# Altium PCB Ant_V1_PCB.PcbDoc
Units mil, origin at the board's own origin, x right, y up, seen from the top; angles counter-clockwise.
Board outline 1889.76 x 3346.46 mil, 2 copper layers (Top Layer, Bottom Layer); 101 components, 67 nets, 376 pads, 165 vias.
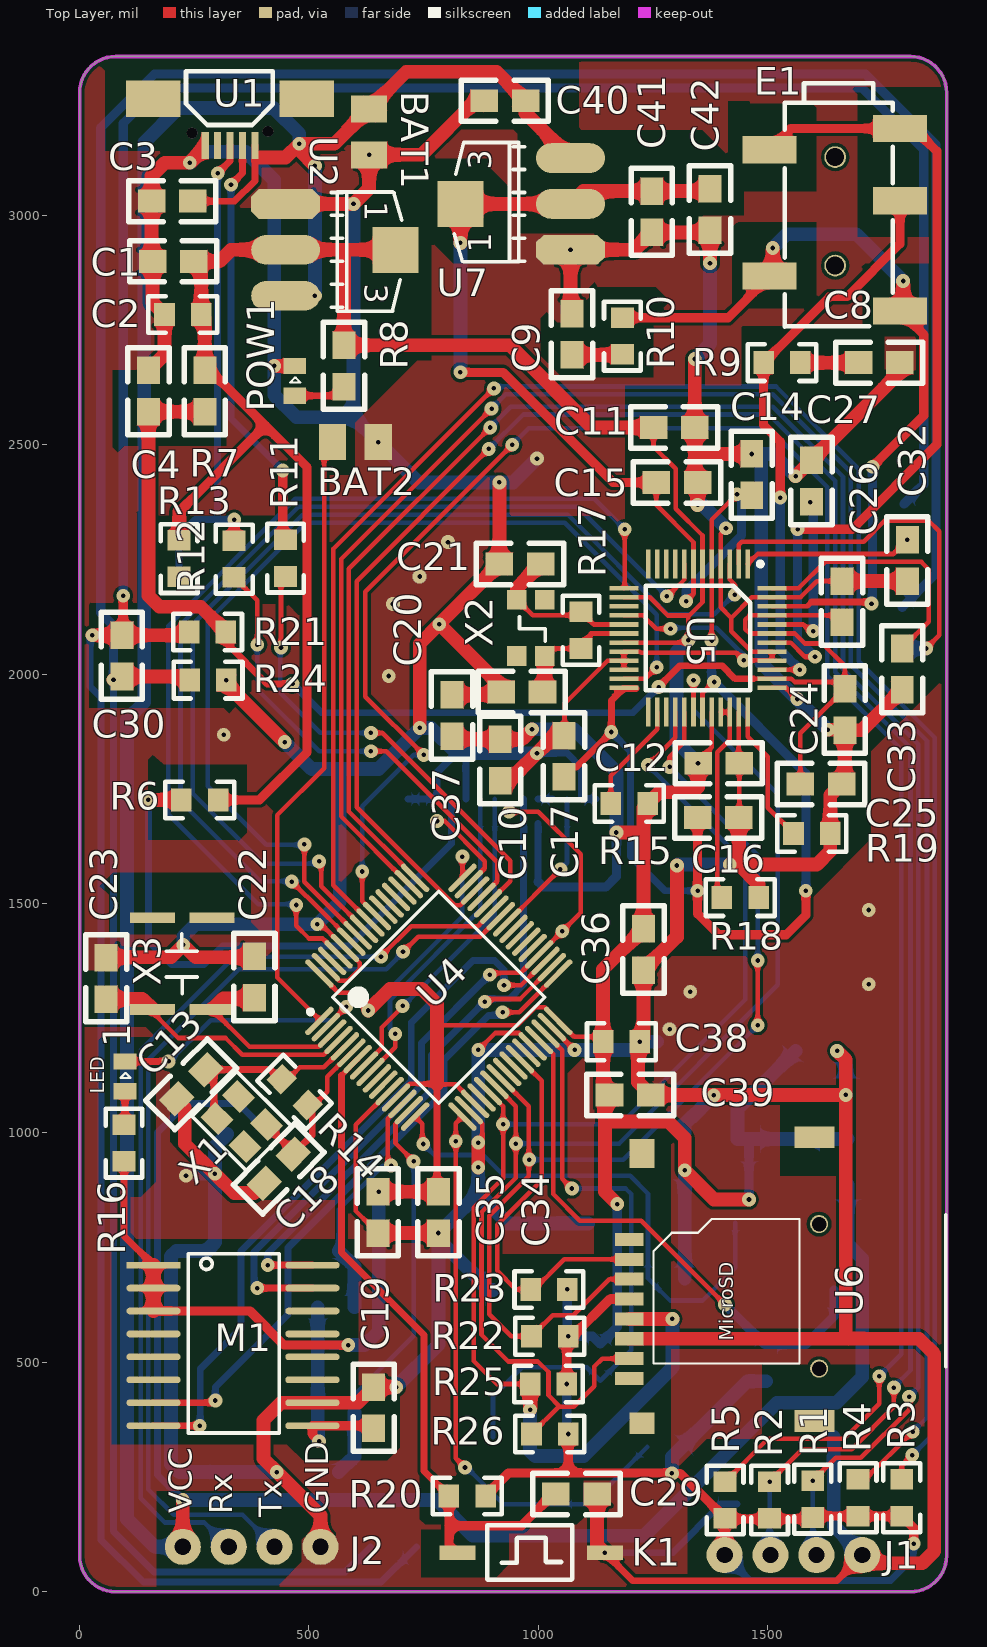
[diagram p0: Top Layer view]
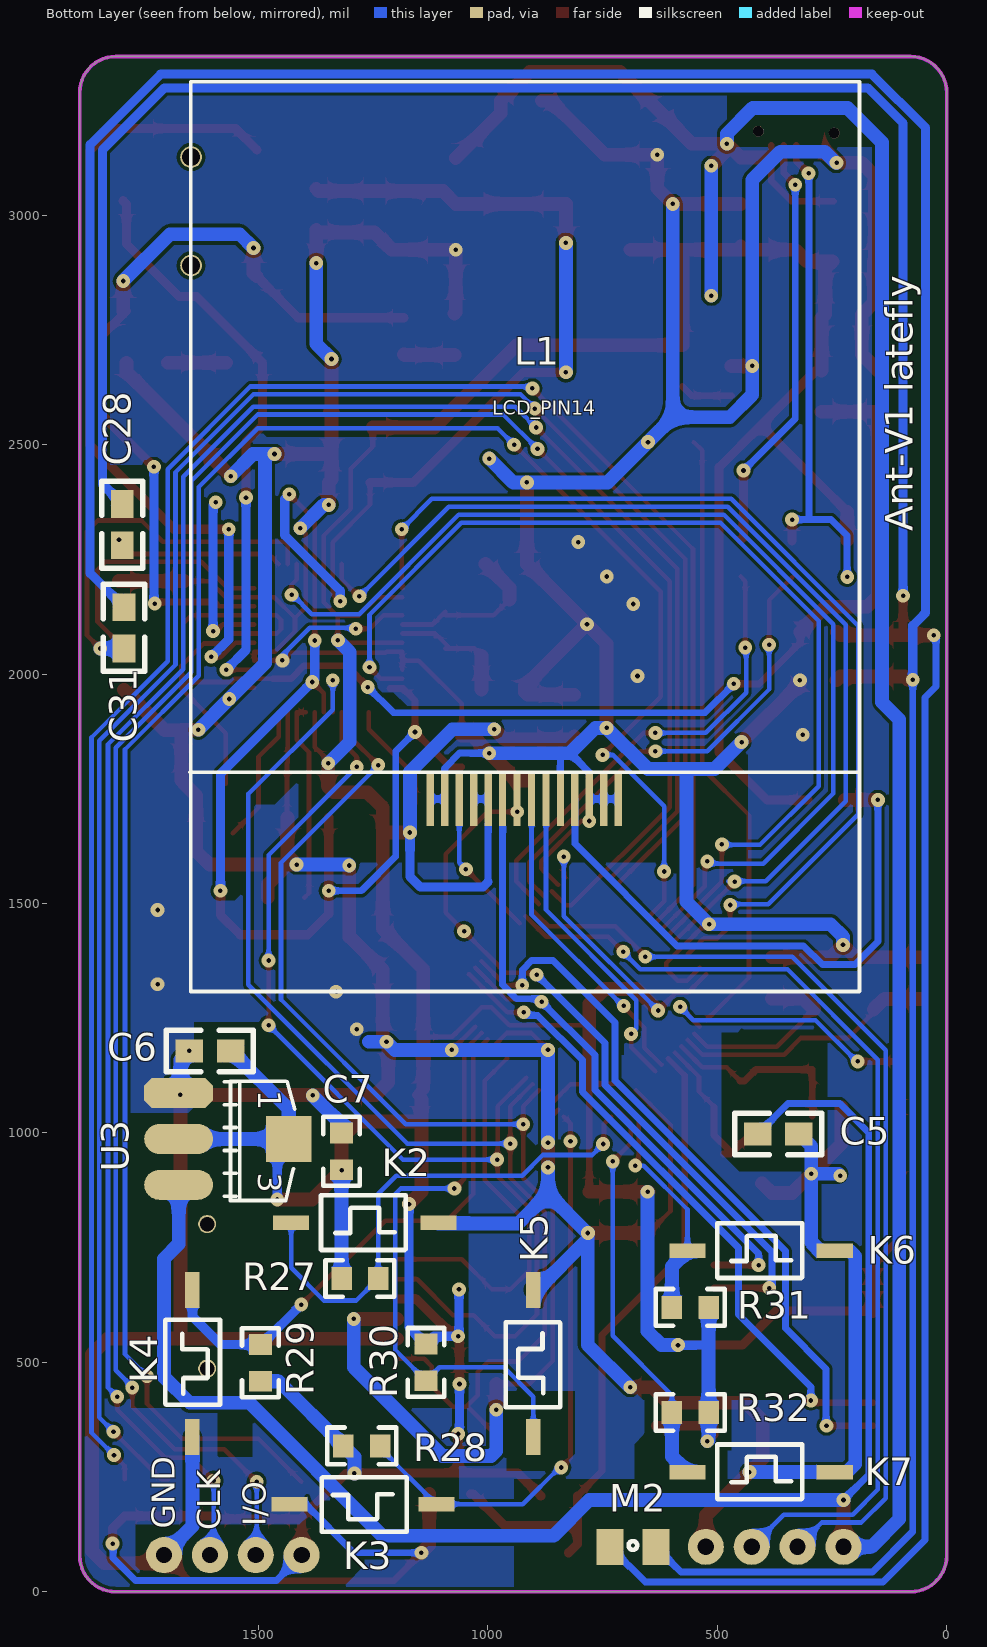
[diagram p1: Bottom Layer view, seen from below]

## Layer stack, top to bottom
Top Solder: solder mask 0.4, Solder Resist, Dk 3.5
Top Layer: signal copper 1.4
Dielectric 1: dielectric 12.6, FR-4, Dk 4.8
Bottom Layer: signal copper 1.4
Bottom Solder: solder mask 0.4, Solder Resist, Dk 3.5

## Board outline
78.74,0 cw(c78.74,78.74) 0,78.74 0,3267.72 cw(c78.74,3267.72) 78.74,3346.46 1811.02,3346.46 cw(c1811.02,3267.72) 1889.76,3267.72 1889.76,78.74 cw(c1811.02,78.74) 1811.02,0

## Design rules (kind name [scope] priority, off if disabled: settings)
Clearance [All] p1: gap=7
DiffPairsRouting [OnLayer('Top Layer') And InDifferentialPairClass('All Differential Pairs')] p1: maxlimit=10 minlimit=10 mostfreqgap=10 toplayer_minwidth=15 toplayer_maxwidth=15 toplayer_prefwidth=15 bottomlayer_minwidth=15 bottomlayer_maxwidth=15 bottomlayer_prefwidth=15 maxuncoupledlength=500
HoleSize [All] p1: absolutevalues=TRUE maxlimit=100 minlimit=8 maxpercent=80.000 minpercent=20.000
MinimumSolderMaskSliver [All] p1: minsoldermaskwidth=0
PolygonConnect [All] p1: connectstyle=Direct reliefconductorwidth=10 reliefentries=4 polygonreliefangle="90 Angle" airgapwidth=10
RoomDefinition Ant_V1_Sheet [InComponentClass('Ant_V1_Sheet')] p1: confinementstyle=ConfineIn formatcopy=TRUE lockcomponents=FALSE outline -6799,-7010 -4799,-7010 -4799,-6010 -6799,-6010
RoutingVias [All] p1: holewidth=28 width=50 viastyle="Through Hole" minholewidth=28 minwidth=50 maxholewidth=28 maxwidth=50
SilkToSilkClearance [All] p1: silktosilkclearance=0
SilkToSolderMaskClearance [IsPad] p1: minsilkscreentomaskgap=0 clearancetoexposedcopper=TRUE
SolderMaskExpansion [All] p1: expansion=4
UndershootRising [All] p1: maximum=1.000
Width GND [InNet('GND')] p1: maxlimit=50 minlimit=10 preferedwidth=30
Width VCC3.3V [All] p2: maxlimit=50 minlimit=10 preferedwidth=30
Width VCC5V [All] p3: maxlimit=50 minlimit=10 preferedwidth=30
Width [All] p4: maxlimit=12 minlimit=8 preferedwidth=10
25 further rules are at their usual default settings.

## Components (designator, comment, footprint, x,y, rotation, side; value= is the part's Value field where it differs from the comment)
1 "LED" LED_LITTLE 99,1091 r90 top
BAT1 "BATT" BATTERY 631,3232 r270 top
BAT2 "BATT" BATTERY 551,2506 r0 top
C1 "104" 0805#1 159,2900 r0 top
C2 "220uF" 0805#2 265,2784 r180 top
C3 "10uF" 0805#1 157,3031 r0 top
C4 "104" 0805#1 150,2662 r270 top
C5 "10uF" 0805#1 322,998 r0 bottom
C6 "104" 0805#1 1651,1179 r180 bottom
C7 "220uF" 0805#2 1319,920 r90 bottom
C8 "103" 0805#1 1698,2679 r0 top
C9 "103" 0805#1 1073,2696 r90 top
C10 "104" 0805#1 917,1858 r270 top
C11 "104" 0805#1 1251,2538 r0 top
C12 "104" 0805#1 1348,1806 r0 top
C13 "20uF" 0805#1 275,1138 r225 top
C14 "104" 0805#1 1465,2390 r90 top
C15 "104" 0805#1 1257,2418 r0 top
C16 "104" 0805#1 1347,1688 r0 top
C17 "104" 0805#1 1056,1776 r90 top
C18 "20uF" 0805#1 466,954 r225 top
C19 "104" 0805#1 641,356 r90 top
C20 "22" 0805#1 1009,1961 r180 top
C21 "22" 0805#1 1005,2240 r180 top
C22 "20uF" 0805#1 381,1385 r270 top
C23 "20uF" 0805#1 58,1382 r270 top
C24 "104" 0805#1 1668,1968 r270 top
C25 "104" 0805#1 1571,1761 r0 top
C26 "104" 0805#1 1662,2113 r90 top
C27 "1uF" 0805#1 1595,2376 r90 top
C28 "1uF" 0805#1 1797,2371 r270 bottom
C29 "104" 0805#1 1128,213 r180 top
C30 "101" 0805#1 92,1995 r90 top
C31 "1uF" 0805#1 1793,2056 r90 bottom
C32 "104" 0805#1 1804.06,2203 r90 top
C33 "104" 0805#1 1793,1966 r90 top
C34 "104" 0805#1 782,782 r90 top
C35 "104" 0805#1 650,782 r90 top
C36 "104" 0805#1 1229,1355 r90 top
C37 "104" 0805#1 812,1955 r270 top
C38 "220uF" 0805#2 1141,1199 r0 top
C39 "22" 0805#1 1245,1083 r180 top
C40 "104" 0805#1 882,3250 r0 top
C41 "104" 0805#1 1247,2963 r90 top
C42 "10uF" 0805#1 1374,2968 r90 top
E1 "EARPHONE" EARPHONE 1647,3127 r0 top
J1 "SWD" SWD 1406,80 r0 top
J2 "Uart" Uart 225,98 r0 top
K1 "Key" KEY 824,85 r0 top
K2 "Key" KEY 1428.87,804 r180 bottom
K3 "Key" KEY 1112,191 r0 bottom
K4 "Key" KEY 1644,658 r270 bottom
K5 "Key" KEY 901,337.13 r90 bottom
K6 "Key" KEY 565,743 r180 bottom
K7 "Key" KEY 565,261 r180 bottom
L1 "LCD_Pin14" LCD_PIN14_Rctify 716,1728 r180 bottom
M1 "W25Q128" W25Q128 161,712 r0 top
M2 "MIC" MIC 634,98 r0 bottom
POW1 "DS0" LED_LITTLE 469,2607 r90 top
R1 "10K" 0805#2 1598,242 r270 top
R2 "10K" 0805#2 1504,240 r270 top
R3 "10K" 0805#2 1792,245 r270 top
R4 "10K" 0805#2 1697,245 r270 top
R5 "10K" 0805#2 1407,240 r270 top
R6 "3.9R" 0805#2 222,1726 r0 top
R7 "10R" 0805#1 273,2662 r270 top
R8 "1K" 0805#1 576,2627 r90 top
R9 "10R" 0805#2 1571,2679 r180 top
R10 "10R" 0805#2 1183,2697 r90 top
R11 "27R" 0805#2 449,2213 r90 top
R12 "27R" 0805#2 337,2211 r90 top
R13 "1K" 0805#2 217,2292 r270 top
R14 "1M" 0805#2 497,1061 r135 top
R15 "100K" 0805#2 1158,1718 r0 top
R16 "10K" 0805#2 97,1018 r270 top
R17 "1M" 0805#2 1093,2136 r270 top
R18 "100K" 0805#2 1400,1513 r0 top
R19 "10K" 0805#2 1636,1653 r180 top
R20 "10K" 0805#2 805,209 r0 top
R21 "1K" 0805#2 319,2092 r180 top
R22 "10K" 0805#2 985,557 r0 top
R23 "10K" 0805#2 983,659 r0 top
R24 "1K" 0805#2 240,1987 r0 top
R25 "10K" 0805#2 1062,453 r180 top
R26 "10K" 0805#2 1065,344 r180 top
R27 "10K" 0805#2 1239,683 r0 bottom
R28 "10K" 0805#2 1235,318 r0 bottom
R29 "10K" 0805#2 1496,539 r270 bottom
R30 "10K" 0805#2 1135,460 r90 bottom
R31 "10K" 0805#2 599,620 r180 bottom
R32 "10K" 0805#2 599,391 r180 bottom
U1 "MicroUSB" USB 328,3152 r0 top
U2 "AMS1117-3.3" AMS1117 449,3025 r270 top
U3 "AMS1117-3.3" AMS1117 1674,1087 r270 bottom
U4 "STM32F103RGT6" STM-LQFP64_M 783,1296 r45 top
U5 "VS1053B/VS1003B" mTQFP48 1405,2074 r270 top
U6 "MicroSD" MICROSD 1198,768 r90 top
U7 "AMS1117-1.8" AMS1117 1070,2925 r90 top
X1 "8MHz" XTAL_8M 299,1032 r135 top
X2 "12.288MHz" XTAL_12.288M 1014,2040 r270 top
X3 "32.768Hz" XTAL32.768K_4Pin' 159,1269 r90 top

## Footprints (in the part's own frame and the unit in brackets; to place one, negate y for a bottom-side part, rotate by r counter-clockwise, add the part's x,y. Pads: shape width x height; smd on the part's side, far side on the other; paste and mask are expansions set on the pad)
0805#1 [mil]
  rect 60x50 smd: 1(0,-0.06) 2(90,-0.06)
  silkscreen extent -50,-45 140,45
0805#2 [mil]
  rect 44.88x50 smd: 1(0,0) 2(80,0)
  silkscreen extent -35,-40 115,40
AMS1117 [mil]
  oct 65x150 smd: 1(0.03,-0.06)
  oval 65x150 smd: 2(100.03,-0.06) 3(200.03,-0.06)
  rect 100x100 smd: 4(100.03,239.94)
  silkscreen extent -26,100 234,253
BATTERY [mm]
  rect 1.5x2 smd: 1(0,0) 2(2.54,0)
EARPHONE [mm]
  rect 3x1.5 smd: 1(-3.632,-6.591) 2(-3.632,0.409) 3(3.581,1.584) 4(3.581,-2.416) 5(3.581,-8.516)
  round 1.2 hole 1 unplated: 6(0,0) 7(0,-6)
  silkscreen extent -2.79,-9.39 3.17,4.1
KEY [mm]
  rect 2x0.8 smd: 1(0,0) 2(8.15,0)
  silkscreen extent 1.65,-1.5 6.35,1.52
LCD_PIN14_Rctify [mm] "this is a updata to LCD_Pin"
  rect 0.4x3 smd: 1(0,0) 2(-0.8,0) 3(-1.6,0) 4(-2.4,0) 5(-3.2,0) 6(-4,0) 7(-4.8,0) 8(-5.6,0) 9(-6.4,0) 10(-7.2,0) 11(-8,0) 12(-8.8,0) 13(-9.6,0) 14(-10.4,0)
  silkscreen extent -23.72,-10.65 13.36,39.7
LED_LITTLE [mm]
  rect 0.9x1.25 smd: 1(0,0) 2(1.65,0)
  silkscreen extent 0.74,-0.3 0.99,0.25
MIC [mm]
  rect 1.5x2 smd: 1(0,0) 2(2.54,0)
  silkscreen extent 1.03,-0.32 1.51,0.16
MICROSD [mm]
  rect 0.725x1.6 smd: 1(0,0) 2(-1.1,0) 3(-2.2,0) 4(-3.3,0) 5(-4.4,0) 6(-5.5,0) 7(-6.6,0) 8(-7.7,0)
  rect 1.6x1.4 smd: 9(4.76,-0.711)
  rect 1.2x2.2 smd: 10(5.649,-10.262) 11(-10.049,-10.262)
  rect 1.2x1.4 smd: 12(-10.176,-0.711)
  round 1 hole 0.8 unplated: 13(0.85,-10.513) 14(-7.15,-10.513)
  silkscreen extent -7.03,-17.53 1.37,-1.35
mTQFP48 [mm]
  rect 1.6x0.254 smd: 1(-4.223,1.3) 2(-4.223,0.8) 3(-4.223,0.3) 4(-4.223,-0.2) 5(-4.223,-0.7) 6(-4.223,-1.2) 7(-4.223,-1.7) 8(-4.223,-2.2) 9(-4.223,-2.7) 10(-4.223,-3.2) 11(-4.223,-3.7) 12(-4.223,-4.2) 25(3.977,-4.2) 26(3.977,-3.7) 27(3.977,-3.2) 28(3.977,-2.7) 29(3.977,-2.2) 30(3.977,-1.7) 31(3.977,-1.2) 32(3.977,-0.7) 33(3.977,-0.2) 34(3.977,0.3) 35(3.977,0.8) 36(3.977,1.3)
  rect 0.254x1.6 smd: 13(-2.873,-5.55) 14(-2.373,-5.55) 15(-1.873,-5.55) 16(-1.373,-5.55) 17(-0.873,-5.55) 18(-0.373,-5.55) 19(0.127,-5.55) 20(0.627,-5.55) 21(1.127,-5.55) 22(1.627,-5.55) 23(2.127,-5.55) 24(2.627,-5.55) 37(2.627,2.65) 38(2.127,2.65) 39(1.627,2.65) 40(1.127,2.65) 41(0.627,2.65) 42(0.127,2.65) 43(-0.373,2.65) 44(-0.873,2.65) 45(-1.373,2.65) 46(-1.873,2.65) 47(-2.373,2.65) 48(-2.873,2.65)
  silkscreen extent -4.35,-4.35 2.78,2.12
STM-LQFP64_M [mm] "Thin QFP, 64-Leads, Body 10x10mm, Pitch 0.5mm, IPC Low Density"
  oval 2.1x0.3 smd: 1(-5.6,3.75) 2(-5.6,3.25) 3(-5.6,2.75) 4(-5.6,2.25) 5(-5.6,1.75) 6(-5.6,1.25) 7(-5.6,0.75) 8(-5.6,0.25) 9(-5.6,-0.25) 10(-5.6,-0.75) 11(-5.6,-1.25) 12(-5.6,-1.75) 13(-5.6,-2.25) 14(-5.6,-2.75) 15(-5.6,-3.25) 16(-5.6,-3.75) 33(5.6,-3.75) 34(5.6,-3.25) 35(5.6,-2.75) 36(5.6,-2.25) 37(5.6,-1.75) 38(5.6,-1.25) 39(5.6,-0.75) 40(5.6,-0.25) 41(5.6,0.25) 42(5.6,0.75) 43(5.6,1.25) 44(5.6,1.75) 45(5.6,2.25) 46(5.6,2.75) 47(5.6,3.25) 48(5.6,3.75)
  oval 0.3x2.1 smd: 17(-3.75,-5.6) 18(-3.25,-5.6) 19(-2.75,-5.6) 20(-2.25,-5.6) 21(-1.75,-5.6) 22(-1.25,-5.6) 23(-0.75,-5.6) 24(-0.25,-5.6) 25(0.25,-5.6) 26(0.75,-5.6) 27(1.25,-5.6) 28(1.75,-5.6) 29(2.25,-5.6) 30(2.75,-5.6) 31(3.25,-5.6) 32(3.75,-5.6) 49(3.75,5.6) 50(3.25,5.6) 51(2.75,5.6) 52(2.25,5.6) 53(1.75,5.6) 54(1.25,5.6) 55(0.75,5.6) 56(0.25,5.6) 57(-0.25,5.6) 58(-0.75,5.6) 59(-1.25,5.6) 60(-1.75,5.6) 61(-2.25,5.6) 62(-2.75,5.6) 63(-3.25,5.6) 64(-3.75,5.6)
  silkscreen extent -5.72,-4.15 4.15,4.57, body extent -5,-5 5,5, height 1.6
SWD [mm]
  round 2 hole 0.9: 1(0,0) 2(2.54,0) 3(5.08,0) 4(7.62,0)
Uart [mm]
  round 2 hole 0.9: 1(0,0) 2(2.54,0) 3(5.08,0) 4(7.62,0)
USB [mm]
  rect 0.4x1.5 smd: 1(-1.38,0) 2(-0.69,0) 3(0,0) 4(0.69,0) 5(1.38,0)
  rect 3x2 smd: 6(4.25,2.6) 7(-4.25,2.6)
  round 0.6 hole 0.6 unplated: 8(2.1,0.8) 9(-2.1,0.7)
  silkscreen extent -2.44,1.14 2.36,4.11
W25Q128 [mm]
  rect 3x0.37 smd: 1(0,0)
  oval 3x0.37 smd: 2(0,-1.27) 3(0,-2.54) 4(0,-3.81) 5(0,-5.08) 6(0,-6.35) 7(0,-7.62) 8(0,-8.89) 9(8.8,-8.89) 10(8.8,-7.62) 11(8.8,-6.35) 12(8.8,-5.08) 13(8.8,-3.81) 14(8.8,-2.54) 15(8.8,-1.27) 16(8.8,0)
  silkscreen extent 1.93,-9.3 6.96,0.64
XTAL32.768K_4Pin' [mm]
  rect 0.6x2.5 smd: 1(0,0) 2(0,-3.3) 3(5.08,-3.3) 4(5.08,0)
  silkscreen extent 0.88,-2.46 4.19,-0.76
XTAL_8M [mm]
  rect 1.4x1.2 smd: 1(0,0) 2(-2.2,-1.7) 3(0,-1.7) 4(-2.2,0)
  silkscreen extent -3.23,-2.62 1.04,0.89
XTAL_12.288M [mm]
  rect 1.1x1.1 smd: 1(0,0) 2(-3.103,-1.552) 3(-3.103,0) 4(0,-1.552)
  silkscreen extent -2.16,-1.4 -0.81,0.03

## Part data
1 POW1: library part LED2, "Typical RED, GREEN, YELLOW, AMBER GaAs LED"
BAT1 BAT2: library part BAT
C1 C4 C6 C8 C9 C10 C11 C12 C14 C15 C16 C17 C20 C21 C24 C25 C26 C27 C28 C29 C30 C31 C32 C33 C39 C40 C41 C42: library part C
C2 C7 C38: library part CAP
C3 C5 C13 C18 C19 C22 C23 C34 C35 C36 C37: library part C_2
R1 R2 R3 R4 R5 R6 R9 R10 R15 R17 R18 R19 R20 R21 R22 R23 R24 R25 R26: library part Res1, "Resistor"
R7 R8 R11 R12 R13 R14 R16 R27 R28 R29 R30 R31 R32: library part R
U2 U3 U7: library part AMS1117
U4: "ARM Cortex-M3 32-bit MCU, 1024 KB Flash, 96 KB Internal RAM, 51 I/Os, 64-pin LQFP, -40 to 85 degC, Tray"
U5: library part VS1053
X1 X2 X3: library part XTAL, "Crystal Oscillator"

## Via types
v1: diameter 30/30 (per signal layer), hole 10, Top Layer to Bottom Layer, 165 vias

## Nets (pads, with @x,y where several pads share a name; then routed paths per layer and width w, separated by ;. In a path a pad name is that pad's centre, name@x,y a point inside that pad or via, vN(x,y) a via of type N, cw(c..) or ccw(c..) an arc to the next point about the centre after c; other vN are vias at no path point)
AVDD: C4.2 C24.1 C25.1 C26.1 R7.2 R21.1 U5.38 U5.43 U5.45 | length 3012.1
  Top Layer w10: 1470.74,1990.26 U5.38 1551.44,1990.26 1558.76,1982.94 1652.99,1982.94 C24.1 ; C25.1 1571,1871.06 C24.1 ; C26.1 1647.01,2128.05 U5.45 1460.05,2128.05 1451,2119 1451,2098.11 1460.42,2088.68 U5.43 1559.13,2088.68 1580.82,2067 1619,2067 1667.94,2018.06 C24.1
  Top Layer w15: R21.1 319,2069 409,1979 v1(464,1979) ; v1(1262,1972) 1308.5,2018.5 1400.5,2018.5 1429,1990 1469,1990
  Top Layer w30: R7.2 C4.2 149.94,2171.06 174,2147 264,2147 R21.1
  Bottom Layer w15: v1(464,1979) 527,1916 1206,1916 v1(1262,1972)
CVDD: C14.1 C15.1 C16.1 C17.1 C41.2 C42.2 U5.5 U5.7 U5.24 U5.31 U7.2 U7.4 | length 4354.8
  Top Layer w10: C15.1 1257,2369 1338.07,2287.93 U5.7 1338.07,2175.07 v1(1322,2159) ; U5.31 1357.76,1958.76 1382,1983 v1(1383,1983) ; v1(1377.44,2073.44) U5.5 1377.44,2336.44 v1(1433,2392)
  Top Layer w15: C17.1@1057.06,1798 1083,1798 v1(1159,1874) 1159,1943.08 1184.92,1969 U5.24@1213,1969
  Top Layer w20: v1(830.06,2657.94) 922.88,2657.94 1162.88,2417.94 C15.1 ; C16.1 1347,1478 1393,1432 1540,1432 1583,1475 v1(1583,1528)
  Top Layer w30: v1(830.06,2940.06) U7.4 U7.2 1098.03,3053 C41.2 1369.06,3053 C42.2
  Bottom Layer w15: v1(1159,1874) 1201,1832 1201,1603 1276,1528 v1(1347,1528)
  Bottom Layer w20: v1(1322,2159) 1322,2182 1443,2303 1443,2382 v1(1433,2392) ; v1(1377.44,2073.44) 1377.44,1988.56 v1(1383,1983) 1583,1783 v1(1583,1528)
  Bottom Layer w30: v1(830.06,2657.94) v1(830.06,2940.06)
D+: R12.2 R13.2 U1.3 | length 1096.4
  Top Layer w15: v1(301,3092) 328,3119 U1.3
  Top Layer w20: R12.2 v1(337,2337)
  Bottom Layer w15: v1(217,2212) 217,2302 252,2337 v1(337,2337) ; 300.5,2337.5 300.5,3091.5 v1(301,3092)
D-: R11.2 U1.4 | length 918.7
  Top Layer w15: v1(330,3067) 355.17,3092.17 U1.4
  Top Layer w20: v1(443,2444) 443,2299 R11.2
  Bottom Layer w15: v1(330,3067) 330,2557 v1(443,2444)
GBUF: E1.2 E1.3 U5.42 | length 1815
  Top Layer w10: U5.42 1550,2069 1581,2038 v1(1603,2038)
  Top Layer w20: E1.2 1550.24,3189.35 E1.3 1819.41,3189.35 1868.56,3140.21 1868.56,2500.56 1684,2316 v1@1574,2316
  Bottom Layer w10: v1@1602.87,2038.13 v1(1603,2038)
  Bottom Layer w20: v1(1565,2316) 1565,2210 1565,2075.75 v1@1602.75,2038
GND: BAT1.2 BAT2.2 C1.1 C2.2 C3.1 C4.1 C5.1 C6.1 C7.2 C8.2 C9.2 C10.2 C11.2 C12.2 C13.2 C14.2 C15.2 C16.2 C17.2 C18.2 C19.2 C20.2 C21.2 C22.1 C23.1 C24.2 C25.2 C26.2 C27.2 C29.1 C32.1 C33.1 C34.1 C35.1 C36.1 C37.1 C38.2 C39.1 C40.1 C41.1 C42.1 J1.4 J2.4 K1.2 K2.2 K3.2 K4.2 K5.2 K6.2 K7.2 L1.1 L1.2 L1.3 L1.5 L1.13 L1.14 M1.10 POW1.2 R18.2 R19.1 R24.2 U1.1 U2.1 U3.1 U4.12 U4.18 U4.28 U4.31 U4.47 U4.60 U4.63 U5.4 U5.16 U5.20 U5.21 U5.22 U5.35 U5.37 U5.40 U5.41 U5.47 U6.6 U7.1 | length 21243.9
  Top Layer w10: v1(518,1455) 526.56,1455 611,1370.56 611,1357 586,1332 566.05,1332 U4.63@538.02,1360.03 ; C35.1 602,830.06 602,1017.56 U4.12@677.21,1092.78 ; v1(779,1680) 795.96,1680 883.52,1592.43 883.52,1577.48 U4.47 U4.47@847.03,1540.98 ; U4.18@847.03,1051.02 878,1020.05 v1@878,988 ; v1(869,1181) 905.86,1217.86 958.57,1217.86 U4.28 ; U4.31@1027.98,1231.97 v1(1078.95,1181) ; C17.2@1057.06,1866 1057.06,1936.06 1150.63,2029.63 U5.21 ; U5.22 U5.21 ; U5.16 1227.95,2128.05 1257,2099 v1(1288,2099) ; v1(1409,2318) 1397.13,2306.13 U5.4 1397.13,2145.69 1420.41,2122.41 1420.41,2093.59 1464.69,2049.31 U5.41 U5.40 1508.96,2030 v1(1448,2030) 1431.56,2046.44 1223.87,2046.44 1221,2049.31 U5.20 U5.21 ; 1420.5,2122.5 1465.42,2167.42 U5.47 1571.42,2167.42 1607,2203 C26.2 ; U5.35 1436.5,1807.44 C12.2 C16.2@1438,1688.94 ; U5.37 1539.43,1970.57 v1(1564,1946)
  Top Layer w15: v1(1144.87,85) 1205.87,24 1650,24 J1.4
  Top Layer w30: C23.1@57.94,1383 199,1383 v1(226,1410) 253,1383 C22.1@380.94,1383 ; C4.1 185,2697.06 C2.2 159,2810 C1.1 157,2901.94 C3.1 157,3086 186,3115 v1(240,3115) U1.1@266,3141 ; 229.32,1055.41 229.32,976.68 v1(295,911) 337,869 380.91,869 C18.2 ; v1(320,1987) 320,1979 v1(447,1852) ; v1(424.04,2671.96) POW1.2 ; U2.1 v1(596.97,3024.97) 631,3059 v1(631,3132) 745,3132 862.94,3249.94 C40.1 ; J2.4 525,166 v1(430,261) 401,290 401,374 439,412 M1.10 607.06,412 C19.2 v1(690,446) ; C35.1 C34.1@776.06,782 ; v1(741.33,1883) 741.33,2066.39 v1(784,2109.06) ; C37.1 912.94,1955 C20.2 919,1974.06 v1(784,2109.06) ; v1(869,925) v1(869,979) ; v1(915,2418) C21.2 v1(784,2109.06) ; C10.2 937.06,1768 v1(997,1827.94) 1035.06,1866 C17.2 C17.2@1057.06,1866 ; C9.2 1070.06,2789 v1(1070.06,2925.03) 1209.1,2925.03 C41.1 1369.06,2963 C42.1 v1(1374.06,2896.06) ; C29.1 1128,101.87 v1(1144.87,85) ; U6.6 1676.54,551.46 ; v1(1221,1199) 1217,1195 1217,1111.06 C39.1 v1(1670.16,1083.06) ; C38.2@1229.06,1207.06 C36.1 1301,1426.94 ; 1302,1426.94 v1(1302,1583) ; v1(1341,2687) C11.2 1341,2480.94 ; v1(1347,2369) C15.2 1341,2423.94 1341,2480.94 ; C16.2 1437,1605 v1(1417,1585) 1437,1585 ; v1(1465.06,2480) 1341.94,2480 1341,2480.94 ; R18.2 1480,1542 1437,1585 ; v1(1560.53,2431.47) C27.2 1788,2658.94 C8.2 ; v1(1631,1879) 1666.94,1879 C24.2 ; v1(1651,1178.94) 1670.16,1159.78 v1(1670.16,1083.06) ; C26.2 C32.1 ; J1.4 1724,62 1836,62 1863,89 1863,518 1829.54,551.46 1676.54,551.46 ; C33.1 1705.06,1878 C24.2 ; 1437,1585 1607,1585 1636,1614 R19.1 1636,1735.94 C25.2 1667.94,1767.87 C24.2 ; v1(1670.16,1083.06) 1670.16,557.84 1676.54,551.46
  Bottom Layer w10: v1@1288,2101.07 1388,2101.07 1448,2041.07 v1(1448,2030)
  Bottom Layer w15: L1.1 L1.2 L1.3 778.99,1785.86 821.06,1827.94 ; L1.5 841.98,1827.92 ; v1(997,1827.94) 1062.06,1827.94 1093.95,1796.05 L1.13 L1.14 ; v1(1144.87,85) 1292,85 1398,191 K3.2
  Bottom Layer w30: v1(226,1410) 226,1428 253,1455 v1(518,1455) 567,1504 567,1793 ; v1@236,911 v1(295,911) ; v1@241,3114 266,3139 362,3139 424.04,3076.96 v1(424.04,2671.96) 424.04,2608.96 472.97,2560.03 596.97,2560.03 ; C5.1 295,971.06 v1(295,911) ; v1(430,261) K7.2 217,261 199.5,278.5 199.5,731.5 211,743 K6.2 276,743 295,762 v1(295,911) ; v1(447,1852) 505.86,1793.14 651.47,1793.14 v1(741.33,1883) 766,1883 821.06,1827.94 842,1827.94 v1(997,1827.94) ; v1(596.97,3024.97) 596.97,2560.03 ; v1(690,446) 782.53,538.53 v1@782.53,768.47 ; v1(782.06,782) v1@782.53,781.53 ; v1(869,925) 869,868 ; v1(869,979) v1(869,1181) ; v1@878,1181 v1(1078.95,1181) 1203,1181 v1(1221,1199) 1259,1199 ; K5.2 893,658 v1@782.53,768.47 ; v1(997,2470) 945,2418 v1(915,2418) 739,2418 v1(651,2506) 596.97,2560.03 ; K2.2@1108,803 934,803 869,868 ; v1(1302,1583) 1304,1585 v1(1417,1585) ; C7.2 1319,1019 v1(1382,1082) ; v1(1341,2687) 1374.06,2720.06 v1(1374.06,2896.06) ; v1(1347,2369) 1358,2369 v1(1409,2318) ; v1(1465.06,2480) 1512,2480 v1(1560.53,2431.47) ; 1486,2480 1486,2024 v1(1564,1946) v1(1631,1879) ; K4.2 1644,143 J1.4@1706,81 ; v1(1651,1178.94) 1670.16,1159.78 v1(1670.16,1083.06) ; v1@782.53,768.47 v1@782.53,781.53 ; v1@782.53,781.53 869,868
  other v1: 232,907 1286,1226 1331,1308 1720,1324 1720,1486 314,1868 674,1996 683,2153 741,2213 803,2288
KEYBACK: K7.1 R32.1 U4.15 | length 884.5
  Top Layer w10: U4.15 688.54,1020.59 688.54,977.46 v1(728,938)
  Bottom Layer w10: R32.1 599,429 728,558 v1(728,938)
  Bottom Layer w30: K7.1 599,295 R32.1
KEYDOWN: K3.1 R28.1 U4.17 | length 1261.2
  Top Layer w10: v1(820,982) 820,1021.2 U4.17 ; v1@820.06,982 820.06,290.94 v1(840,271)
  Bottom Layer w10: v1(840,271) 844,271 924,191 K3.1 1113,191 R28.1@1237.5,315.5
KEYLEFT: K4.1 R29.1 U4.29 | length 1181.5
  Top Layer w10: U4.29@1000.14,1204.13 1032,1172.28 1032,867 1090,809 1224,809 v1(1407,626)
  Bottom Layer w20: v1(1407,626) 1494,539 R29.1 1583,539 1644,600 K4.1
KEYOK: K6.1 R31.1 U4.14 | length 533.9
  Top Layer w10: v1(679,929) 671.54,936.46 671.54,1031.42 U4.14 U4.14@705.05,1064.94
  Bottom Layer w10: K6.1 565,833.31 660.69,929 v1(679,929)
  Bottom Layer w30: K6.1 599,709 R31.1
KEYRIGHT: K5.1 R30.1 U4.30 | length 1292.6
  Top Layer w10: U4.30@1014.06,1218.05 1051.95,1180.16 1051.95,900.05 v1(1073,879)
  Bottom Layer w10: K5.1 901,425 965,489 1106,489 R30.1 1202,527 1202,867 1190,879 v1(1073,879)
KEYUP: K2.1 R27.1 U4.16 | length 1123.9
  Top Layer w10: U4.16 747,1020.2 747,978 v1(749,976)
  Bottom Layer w10: v1(749,976) 773,952 880.18,952 925.18,907 1200,907 1239,868 R27.1 1287,635 1358,635 1428.87,705.87 K2.1
LCD_CS: L1.12 U4.41 | length 325.2
  Top Layer w10: U4.41@930.55,1457.47 v1(1048,1574.92)
  Bottom Layer w10: v1(1048,1574.92) 1062.46,1589.38 L1.12
LCD_DC: L1.7 U4.8 | length 697
  Top Layer w10: U4.8@621.53,1148.45 659,1185.92 659,1230 v1@706,1277
  Bottom Layer w10: v1@706,1277 905,1476 L1.7
  other v1: 704,1277
LCD_RST: L1.6 U4.9 | length 703.7
  Top Layer w10: U4.9@635.45,1134.53 688,1187.08 v1(688,1216)
  Bottom Layer w10: v1(688,1216) 676.5,1227.5 676.5,1289.5 873.48,1486.48 L1.6
  Bottom Layer w15: v1@688.5,1216.5 v1@690,1215
MP3_LEFT: E1.1 E1.5 R10.2 U5.46 | length 1762.5
  Top Layer w10: U5.46 1585.74,2147.74 1595.5,2157.5 ; v1@1725,2155 v1(1726,2154)
  Top Layer w15: 1595.5,2157.5 1722.5,2157.5 v1@1725,2155 ; E1.5@1795,2784.72 E1.5@1795,2791.72
  Top Layer w20: R10.2 1413.48,2777 E1.1 ; v1(1728,2452) 1840,2564 1840,2739.72 1795,2784.72 E1.5
  Top Layer w30: E1.1 1511,2874.52 v1(1511,2929) ; E1.5@1795,2791.72 v1(1795,2857)
  Bottom Layer w20: v1(1726,2154) 1728,2156 v1(1728,2452)
  Bottom Layer w30: v1(1511,2929) 1541,2959 1693,2959 v1(1795,2857)
MP3_RIGHT: E1.4 R9.2 U5.39 | length 1263.4
  Top Layer w10: U5.39 v1(1569.94,2009.94)
  Top Layer w20: v1(1527.18,2385) 1527.18,2506.82 1491,2543 R9.2 1635,2823 1673,2823 1788,2938 1788,3024.87 E1.4@1795,3031.87
  Bottom Layer w20: v1(1527.18,2385) 1527.18,2052.7 v1(1569.94,2009.94)
Net1_1: 1.1 R16.1 | length 73.8
  Top Layer w15: R16.1 99,1020 1.1
Net1_2: 1.2 U4.2 | length 591.6
  Top Layer w10: U4.2@538.02,1231.97 v1(581.05,1275)
  Top Layer w15: 1.2 v1(194,1156)
  Bottom Layer w10: v1@195,1155 286,1246 552.05,1246 v1(581.05,1275)
NetBAT2_1: BAT2.1 U4.1 | length 1348.4
  Top Layer w10: U4.1@524.1,1245.89 431,1338.99 431,1693 533,1795 533,2488 BAT2.1
NetC8_1: C8.1 R9.1 | length 127
  Top Layer w30: R9.1 1571.06,2678.94 C8.1
NetC9_1: C9.1 R10.1 | length 110.4
  Top Layer w30: C9.1 1182,2696 R10.1
NetC13_1: C13.1 R14.2 U4.5 X1.1 | length 427.7
  Top Layer w10: R14.2@450.43,1113.57 479.86,1143 532.56,1143 U4.5
  Top Layer w15: X1.1@292.95,1037.05 292.95,1138 416,1138 440.43,1113.57 R14.2@450.43,1113.57
NetC18_1: C18.1 R14.1 U4.6 X1.2 | length 353.3
  Top Layer w10: C18.1@476.5,964.59 C18.1@487.05,954.05 ; R14.1@507,1057 540,1090 540,1122.6 U4.6
  Top Layer w15: X1.2@425.57,999.08 470.61,954.05 C18.1@487.05,954.05 ; C18.1@476.5,964.59 507,995.09 R14.1@507,1057
NetC20_1: C20.1 R17.2 U5.18 X2.1 | length 271.9
  Top Layer w10: X2.1 1030,2056 R17.2 ; R17.2@1086,2060 1114.68,2088.68 U5.18
  Top Layer w30: C20.1@1014,1966.06 X2.1
NetC21_1: C21.1 R17.1 U5.17 X2.2 | length 365.9
  Top Layer w10: X2.2 953.72,2162.17 987.38,2128.52 1093,2128.52 R17.1 1120.63,2108.37 U5.17
  Top Layer w30: X2.2 952.88,2187.95 ; 953,2187.95 953,2188.06 C21.1
NetC22_2: C22.2 U4.3 X3.2 | length 409.3
  Top Layer w10: X3.2 370.3,1187.62 521.5,1187.62 U4.3
  Top Layer w30: X3.2 312.92,1293 C22.2@380.94,1293
NetC23_2: C23.2 U4.4 X3.1 | length 573.6
  Top Layer w10: X3.1 159,1263 215,1207 318,1207 354.38,1170.62 532.34,1170.62 U4.4
  Top Layer w30: C23.2 136,1292 X3.1
NetC27_1: C27.1 U5.44 | length 372.1
  Top Layer w10: U5.44 1577.63,2108.37 v1@1592,2094
  Bottom Layer w20: v1(1593,2375) 1599,2369 v1(1599,2094)
NetC28_1: C28.1 C30.2 M2.2 R21.2 | length 6694.6
  Top Layer w20: C30.2 95,2087.94 v1(95,2171)
  Top Layer w30: v1(28,2085) C30.2 232,2085 R21.2
  Bottom Layer w15: v1(28,2085) 23,2080 23,1973 47,1949 47,113 139,21 657,21 M2.2
  Bottom Layer w20: v1(95,2171) 95,3201 172,3278 1704.82,3278 1840,3142.82 1840,2413.94 C28.1
NetC28_2: C28.2 C32.2 U5.1 | length 369.8
  Top Layer w10: U5.1 1477.84,2261.92 1617.84,2261.92 1617.92,2262 1773.13,2262 v1(1804.13,2293)
NetC30_1: C30.1 C31.2 M2.1 R24.1 | length 6825.1
  Top Layer w30: v1(74,1988) C30.1@85.06,1988 ; C30.1 232,1995 R24.1
  Bottom Layer w15: v1(74,1988) 74,131 162,43 579,43 M2.1
  Bottom Layer w20: v1(74,1988) 74,2105.82 46,2133.82 46,3191 163,3308 1713,3308 1867,3154 1867,2220.06 C31.2
NetC31_1: C31.1 U5.2 | length 830.5
  Top Layer w10: U5.2 1436.5,2282.5 1443,2289 1709,2289 1755,2335 1850.36,2335 1873.76,2311.59 1873.76,2084.76 v1(1845,2056)
  Bottom Layer w30: C31.1 v1(1845,2056)
NetC33_2: C33.2 U5.48 | length 569.3
  Top Layer w10: U5.48 1567.07,2187.11 1624.96,2245 1835,2245 1835,2244.1 1851,2228.1 1851,2113.94 C33.2
NetL1_4: L1.4 R6.1 | length 1268.9
  Top Layer w30: v1(150,1726) R6.1
  Bottom Layer w15: v1(150,1726) 150,1417 200,1367 271,1367 312,1408 588,1408 810.49,1630.49 L1.4
NetPOW1_1: POW1.1 R8.1 | length 115.3
  Top Layer w15: POW1.1 556.06,2607 R8.1
NetR11_1: R11.1 U4.44 | length 1027.1
  Top Layer w10: v1(439,2058) 439,2203 R11.1 ; v1@634,1872 v1(635,1872) 660,1872 938.28,1593.72 938.28,1548.72 U4.44 U4.44@888.79,1499.22
  Bottom Layer w10: v1(439,2058) 437,2056 437,1959.82 524.82,1872 v1(635,1872)
NetR12_1: R12.1 U4.45 | length 1035.3
  Top Layer w10: R12.1 387.23,2160.77 v1(387.23,2064) ; v1(635,1832) 668,1832 910,1590 910,1548.27 U4.45 U4.45@874.87,1513.14
  Bottom Layer w10: v1(387.23,2064) 387.23,1966.77 522,1832 v1(635,1832)
NetR15_1: R15.1 U5.26 | length 241.4
  Top Layer w10: R15.1 1158,1779 1259.33,1880.33 U5.26
NetR18_1: R18.1 U5.33 U5.34 | length 439.4
  Top Layer w10: U5.33 U5.34 1416.81,1856.72 1390,1829.91 1390,1523 R18.1
NetR19_2: R19.2 U5.36 | length 305.8
  Top Layer w10: U5.36 1456.18,1863.82 1500,1820 1500,1709 R19.2
NRST: C29.2 K1.1 R20.1 U4.7 | length 1458.9
  Top Layer w10: U4.7@606.1,1161.1 U4.7@607.49,1162.49
  Top Layer w12: 571,1125.76 U4.7
  Top Layer w15: 571,1125.76 571,740 751,560 751,263 R20.1
  Top Layer w20: R20.1 805,144 ; K1.1 805,104 805,144 ; C29.2 1032.06,213.06 963,144 805,144
PA15: R4.1 U4.50 | length 4436.9
  Top Layer w10: U4.50@718.97,1540.98 570,1689.95 570,2251.18 898,2579.18 v1(898,2579) ; R4.1 1712,245 v1(1816,349)
  Bottom Layer w10: v1(898,2579) 929,2610 1510.96,2610 1681,2439.96 1681,2020.95 1847,1854.95 1847,380 v1(1816,349)
PB3: R5.1 U4.55 | length 4545.8
  Top Layer w10: v1(616,1570) 616,1504.76 U4.55@649.37,1471.38 ; v1@750,1828.09 v1(750,1824.1) 623,1951.1 623,2180 v1(943,2500) ; R5.1 1501,334 1667,334 1743,410 v1(1743,470)
  Bottom Layer w10: v1(616,1570) 616,1711.9 728.2,1824.1 v1(750,1824.1) ; v1(943,2500) 979,2536 1502,2536 1630,2408 1630,1997 1791,1836 1791,518 v1(1743,470)
PB4: R3.1 U4.56 | length 4516.5
  Top Layer w10: U4.56@635.45,1457.47 553,1539.92 553,2273 v1(903,2623) ; R3.1 1792,275 v1(1815,298)
  Bottom Layer w10: v1(903,2623) 907,2627 1518,2627 1698,2447 1698,2027.99 1864,1861.99 1864,347 v1(1815,298)
PS2_1: U4.10
PS2_2: U4.11
PS2_3: U4.24
PS2_4: U4.25
RX: J2.2 U4.43 | length 2110.7
  Top Layer w10: v1(657,1384) 657,1385.18 722.82,1451 868.4,1451 U4.43
  Bottom Layer w10: J2.2 272,151 186,151 133,204 133,1180 337,1384 v1(657,1384)
SD_CS: R23.1 U4.26 U6.2 | length 854.9
  Top Layer w10: U4.26@958.38,1162.37 1007,1113.76 1007,897 910,800 910,700 951,659 R23.1 991,659 1056.69,724.69 U6.2
SPI1_CLK: R25.2 U4.21 U5.28 U6.5 | length 2894.2
  Top Layer w10: U4.21@888.79,1092.78 923,1058.56 v1(923,1019) 923,901 859,837 859,503 909,453 R25.2 ; v1(1239,1802) 1298.7,1861.7 U5.28
  Top Layer w30: v1(982,397) R25.2 ; U6.5 v1(1292.23,594.77)
  Bottom Layer w10: v1(923,1019) 1179,1019 1451,1291 1451,1589.18 v1@1238.59,1801.59
  Bottom Layer w30: v1(982,397) 982,307 993,296 1099,296 1292.23,489.23 v1(1292.23,594.77)
SPI1_MI: R26.2 U4.22 U5.30 U6.7 | length 2691.5
  Top Layer w10: U4.22@902.71,1106.7 951,1058.4 v1(951,977) 951,901.96 876,826.96 876,560 934,502 999,502 1022,479 1022,428.59 1045.79,404.79 ; R26.2 1044,403 1077,403 1122,448 1122,491 1139.16,508.16 U6.7 ; U5.30 v1(1338.07,1986.93)
  Bottom Layer w10: v1(951,977) 1176,977 1522,1323 1522,1739 1338.07,1922.93 v1(1338.07,1986.93)
SPI1_MO: R22.1 U4.23 U5.29 U6.3 | length 2354.7
  Top Layer w10: U4.23@916.63,1120.62 979,1058.24 979,905.92 893,819.92 893,605 941,557 R22.1 1031,603 1076,603 1154.39,681.39 U6.3 ; v1@1286,1787 1286,1820 1318.39,1852.39 U5.29 ; v1@1471,1228 v1(1478,1235) v1(1478,1376)
  Bottom Layer w10: v1(980,942) 1185,942 v1@1471,1228 ; v1@1286,1787 1297,1787 1478,1606 v1(1478,1376)
  other v1: 1286,1798
SPI2_CLK: L1.9 M1.16 U4.34 | length 1550.4
  Top Layer w10: v1(883,1286) 889,1292 959.95,1292 U4.34@1027.98,1360.03
  Top Layer w15: v1(410,712) M1.16
  Bottom Layer w15: v1(410,712) 410,737 767,1094 767,1170 v1(883,1286) 889.5,1292.5 937.22,1292.5 967.97,1323.25 L1.9 L1.9@967.97,1725.75
SPI2_CS: M1.7 U4.33 | length 1410.8
  Top Layer w10: v1(922,1263) 957.96,1263 1041.07,1346.11 U4.33@1041.9,1346.11
  Top Layer w15: M1.7 291,412 v1(296,417)
  Bottom Layer w15: v1(296,417) 296,446 454,604 454,749.89 794,1089.89 794,1159 891.5,1256.5 915.5,1256.5 v1(922,1263)
SPI2_MI: M1.8 U4.35 | length 1581.5
  Top Layer w10: v1(925,1322) 962.11,1322 U4.35@1014.06,1373.95
  Top Layer w15: M1.8 v1(262,362)
  Bottom Layer w15: v1(262,362) 263,363 263,486 351.5,574.5 351.5,742.5 723,1114 723,1241 857.86,1375.86 904.86,1375.86 925,1355.72 v1(925,1322)
SPI2_MO: L1.8 M1.15 U4.36 | length 1593
  Top Layer w10: v1(894,1345) 898,1349 961.28,1349 v1(1052,1439.72) 1092,1479.72 1092,1608 1000,1700 v1@938,1700
  Top Layer w15: v1(387,662) M1.15
  Bottom Layer w15: v1(387,662) 380.5,668.5 380.5,740.39 745,1104.89 745,1196 v1(894,1345)
  other v1: 936,1700
SWDCLK: J1.3 R1.1 U4.49 | length 4570.9
  Top Layer w10: U4.49@732.89,1554.9 587,1700.79 587,2230 894.82,2537.82 v1(895,2537.82) ; v1(1598,242) 1648,292 1703,292 1808,397 v1(1808,425)
  Bottom Layer w10: v1(895,2537.82) 940.18,2583 1511.09,2583 1664,2430.09 1664,2011.08 1828,1847.08 1828,445 v1(1808,425) ; v1(1598,242) 1598,88 J1.3
SWDIO: J1.2 R2.1 U4.46 | length 4709.1
  Top Layer w10: U4.46@860.95,1527.06 829.89,1496 818,1496 604,1710 604,2203 v1(892,2491) ; v1(1504,240) 1575,311 1683,311 1775,403 v1(1775,445)
  Bottom Layer w10: v1(892,2491) 967,2566 1502.05,2566 1647,2421.05 1647,2004.04 1811,1840.04 1811,483 1775,447 v1(1775,445) ; v1(1504,240) 1504,78 J1.2
TX: J2.3 U4.42 | length 2163.7
  Top Layer w10: v1(705,1395) 738,1428 873.24,1428 U4.42
  Bottom Layer w10: J2.3 355,168 205,168 150,223 150,1160 347,1357 668.18,1357 706.18,1395 v1(705,1395)
VCC3.3V: C1.2 C2.1 C6.2 C7.1 C10.1 C11.1 C12.1 C19.1 C34.2 C35.2 C36.2 C37.2 C38.1 C39.2 J1.1 L1.10 L1.11 M1.1 M1.2 M1.3 M1.9 R1.2 R2.2 R3.2 R4.2 R5.2 R6.2 R7.1 R8.2 R13.1 R15.2 R16.2 R20.2 R22.2 R23.2 R25.1 R26.1 R27.2 R28.2 R29.2 R30.2 R31.2 R32.2 U2.2 U2.4 U3.2 U3.4 U4.13 U4.19 U4.32 U4.48 U4.64 U5.6 U5.14 U5.19 U5.32 U6.4 | length 14443.8
  Top Layer w10: U4.64@524.1,1346.11 564.21,1306 590,1306 v1(629,1267) ; U4.13@691.13,1078.86 719.27,1107 779,1107 ; 779,1106 819.89,1106 U4.19@860.95,1064.94 ; 779,1232 781.86,1234.86 953.86,1234.86 993,1274 1013.79,1274 1078,1209.79 1130.21,1209.79 C38.1 ; U4.48@833.11,1554.9 U4.48 v1(834.5,1602.5) ; U5.19 1322,2069 v1(1327,2074) 1327,2128 ; U5.14 1242.58,2167.42 1282,2128 1329.18,2128 1357.76,2156.57 U5.6 1357.76,2302.24 1299,2361 1299,2447.91 1251,2495.91 C11.1 ; v1(1348,1805.94) 1348,1811.95 1377.44,1841.39 U5.32
  Top Layer w15: R16.2 97,776 M1.1 ; C34.2@779,872 779,1106 ; C12.1@1344,1817.94 1340,1813.94 v1(1348,1805.94)
  Top Layer w20: M1.3 371.34,612 445.63,537.72 v1(585.72,537.72) ; 217,2354 405,2542 ; R7.1 285,2662 405,2542 ; R6.2 392,1726 496,1830 496,2451 405,2542 ; v1(522,328) 507.46,342.54 M1.9 C19.1@635.06,362 ; R20.2 935,259 1065,259 ; v1(1062,453) 1062,554 v1(1065,557) 1075,557 1156.08,638.08 U6.4 ; v1(1065,344) 1065,259 ; C39.2@1141,1097.06 C39.2 ; v1(1818,105) 1818,139 R3.2 R4.2 1601,165 R1.2 1595,159 1406,159 J1.1 1406,161 1309,258 v1(1291,258) 1290,259 1065,259
  Top Layer w30: M1.3 M1.2 M1.1 ; R13.1 217,2354 ; R7.1 272.94,2776.06 C2.1 265,2883.94 C1.2 304.94,2899.94 329.97,2924.97 441.94,2924.97 U2.2@448.94,2931.97 ; U2.2 576,2924.97 ; 576,2924.9 576,2924.97 ; 576.06,2924.9 R8.2 938,2717 1117.06,2537.94 C11.1 ; v1(629,1267) 676,1314 746,1314 779,1281 779,1232 779,1107 ; C35.2 v1(652,872) C34.2@779,872 ; U2.4 576,2924.97 ; C37.2 818.94,1858 C10.1 964,1858 v1(986,1880) ; C39.2@1141,1097.06 C38.1 1141,1356.94 C36.2 1229.06,1709.06 R15.2 1262.5,1742.5 1336.5,1742.5 1348,1754 v1(1348,1805.94) ; C39.2@1145,1073.06 1145,872 v1(1172,845) ; 1146,1025 1283,1025 1319,989 v1(1319,919) 1383,855 v1(1459,855) ; v1(1170,1655) 1224.06,1655 1228.06,1659
  Bottom Layer w10: v1(629,1267) 834.5,1472.5 v1(834.5,1602.5)
  Bottom Layer w15: 999.46,1547.54 L1.10@999.46,1674.63 ; L1.10 L1.11 ; J1.1 1461,25 1768,25 1817,74 1817,93 v1@1823.5,99.5
  Bottom Layer w20: 520.28,537.72 v1(585.72,537.72) ; 999.46,1547.54 1011,1536 1147,1536 1170,1559 v1(1170,1655) ; v1(1062,453) 1062,347 v1(1065,344) ; v1(1063,659) 1063,559 v1(1065,557) 1118,557 R30.2 1172,577 v1(1172,845) ; J1.1 J1.1@1407.24,81.24 ; v1(1459,855) U3.4@1459,986.97
  Bottom Layer w30: R31.2 R32.2 519,331 v1(522,328) ; v1(585.72,537.72) 621.72,537.72 652,568 v1(652,872) ; v1(986,1880) 1077.5,1880 1170,1787.5 v1(1170,1655) ; v1(1291,258) 1291,294 R28.2 1456,459 R29.2 ; R27.2 v1(1319,919) ; v1(1327,2074) 1301.07,2048.07 1301.07,1852.86 v1(1348,1805.94) ; C6.2 1434.06,1052 U3.4 1459,986.97 U3.2
VCC5V: BAT1.1 C3.2 C5.2 C40.2 J2.1 U1.5 U2.3 U3.3 U7.3 | length 8312.6
  Top Layer w15: C3.2 338.15,3030.94 382.33,3075.12 U1.5
  Top Layer w30: J2.1 v1(225,200) ; 391,3126 449,3126 v1(479,3156) ; v1(513,3108) 479,3142 v1(479,3156) ; U7.3 972,3223.1 C40.2 908.94,3313 712,3313 BAT1.1 554.99,3156 v1(479,3156)
  Bottom Layer w15: v1(225,200) 170,255 170,1001 233,1064 346.06,1064 C5.2
  Bottom Layer w30: J2.1 164,98 103.5,158.5 103.5,1901.5 141,1939 141,3159 216,3234 423,3234 479,3178 v1(479,3156) ; v1(225,200) 779,200 857,122 1230,122 1520,412 1650,412 1706,468 1706,726 1674.06,757.94 U3.3 ; v1(513,2825) v1(513,3108)
VS_CS: U4.58 U5.23 | length 2219.2
  Top Layer w10: v1(490,1629) 490,1547.24 U4.58@607.62,1429.63 ; U5.23 1233.26,1990.26 v1(1258,2015)
  Bottom Layer w10: v1@490,1628 407,1628 279,1756 279,2116 493,2330 1057.77,2330 1258,2129.77 v1(1258,2015)
VSDREQ: U4.59 U5.8 | length 2234.8
  Top Layer w10: v1(462.27,1548) 494.03,1516.24 494.94,1516.24 593.7,1417.49 U4.59@593.7,1415.71 ; v1(1280,2170) 1281.91,2170 1318.39,2206.48 U5.8
  Bottom Layer w10: v1@476,1549 394,1549 220,1723 220,2107.96 477.04,2365 1085,2365 v1(1280,2170)
VSRST: U4.57 U5.3 | length 2370.3
  Top Layer w10: v1(522,1592) 527,1587 527,1538.08 U4.57@621.53,1443.55 ; U5.3 1416.81,2206.48 1428,2195.29 v1(1428,2173)
  Bottom Layer w10: v1(522,1592) 523,1592 528,1587 400,1587 247,1740 247,2109 486,2348 1063.82,2348 1280.82,2131 1383.62,2131 1425.62,2173 v1(1428,2173)
VSXDCS: U4.61 U5.13 | length 2201.5
  Top Layer w10: v1(472,1497) 472,1452 500,1424 529.73,1424 U4.61 ; U5.13 1186,2187.61 1189,2190.61 1188,2191.61 v1(1188,2316)
  Bottom Layer w10: v1@472,1499 389,1499 193,1695 193,2105 470,2382 1122,2382 v1(1188,2316)
pads on no net: E1.6 E1.7 M1.4 M1.5 M1.6 M1.11 M1.12 M1.13 M1.14 U1.2 U1.6 U1.7 U1.8 U1.9 U4.20 U4.27 U4.37 U4.38 U4.39 U4.40 U4.51 U4.52 U4.53 U4.54 U4.62 U5.9 U5.10 U5.11 U5.12 U5.15 U5.25 U5.27 U6.1 U6.8 U6.9 U6.10 U6.11 U6.12 U6.13 U6.14 X1.3 X1.4 X2.3 X2.4 X3.3 X3.4

## Polygon pours and split planes (outlines as drawn)
GND on Top Layer "Top Layer-No Net" (solid, pour order 1): 0,78.74 0,3267.72 cw(c78.74,3267.72) 78.74,3346.46 1811.02,3346.46 cw(c1811.02,3267.72) 1889.76,3267.72 1889.76,78.74 cw(c1811.02,78.74) 1811.02,0 78.74,0 cw(c78.74,78.74)
GND on Bottom Layer "Top Layer-No Net" (solid, pour order 2): 0,78.74 0,3267.72 cw(c78.74,3267.72) 78.74,3346.46 1811.02,3346.46 cw(c1811.02,3267.72) 1889.76,3267.72 1889.76,78.74 cw(c1811.02,78.74) 1811.02,0 78.74,0 cw(c78.74,78.74)

## Keep-outs
Keep-Out Layer:
  the board outline again, w8

## Other copper
Top Layer:
  pour cut-out: 602,1822 612,1832 668,1832 779,1721 687,1629 687,1627 603,1711 603,1822
  pour cut-out: 548,1810 548,1601 543,1596 540,1599 489,1599 489,1558 481,1550 466,1565 431,1565 431,1693
  pour cut-out: 58,1525 64,1519 64,1432 401,1432 374,1459 374,1568 73,1568 43,1538
  pour cut-out: 1129,2844 1256,2844 1287,2813 1252,2778 1252,2646 1060,2646 1056,2642 1004,2694 1004,2776 1018,2790 1041,2767 1110,2767 1110,2842 1123,2855
  pour cut-out: 1126,1301 1134.41,1309.41 1252.02,1309.41 1252.02,1114.98 1248.42,1111.37 1238.79,1121 1101,1121 1101,1305 1102,1306 1130,1306
  pour cut-out: 1188,2316 1188,2630 1842,2630 1893,2579 1887,2573 1887,1993 1726,1832 1726,1640.82 1470.18,1385 1116,1385 1116,1395 1074,1437 730,1781 730,2064 941,2275 941,2345 1159,2345
  pour cut-out: 1447,2760 1755,2760 1755,2654 1705,2604 1442,2604 1442,2756 1447,2761
  pour cut-out: 1704,2887 1706,2885 1706,2735 1877,2735 1876,2736 1876,2896 1712,2896 1704,2888
  pour cut-out: 1431,2984 1421,2974 1421,2797 1590,2797 1607,2814 1607,2986 1436,2986 1434,2984
  pour cut-out: 1684,3275 1695,3264 1695,2952 1867,2952 1877.29,2962.29 1877.29,3280.9 1689.9,3280.9
  pour cut-out: 1448,3245 1597,3245 1607,3235 1607,3052 1417,3052 1411,3058 1413,3060 1413,3250 1461,3250
  pour cut-out: 942,2895 814,2895 696,3013 616.72,3013 616.72,3053.71 688.01,3125 894,3125 894,3105 939,3060 939,2896
  pour cut-out: 945.5,3187 954,3178.5 954,2960 1219.34,2960 1258.34,2999 1449,2999 1449,3095 1357,3187
  pour cut-out: 802,3317 805,3314 805,3187 1086,3187 1087,3186 1089,3188 1089,3334 786,3334 775,3323
  pour cut-out: 577,3333 579.24,3335.24 810,3335.24 810,3221 741.72,3152.72 583.44,3152.72 583.44,3326.56
  pour cut-out: 48,3322 55,3315 55,3140 581,3140 577,3144 577,3333 54.63,3333 50.49,3328.86
  pour cut-out: 508.46,2462.95 512.38,2466.87 533,2466.87 533,1795 431,1693 398,1726 392,1726 496,1830 496,2451 508.26,2463.26
  pour cut-out: 381,3008 755,3008 768,2995 768,2683 736,2683 601,2548 601,2434 502,2434 324,2612 340.1,2628.1 340.1,3016.38 380.38,3016.38 386,3022
  pour cut-out: 179.6,3076.87 215.57,3112.85 311.25,3112.85 311.25,3106.75 343,3075 343,2640 353,2630 321,2598 321,2497 97,2497 83,2483 71,2495 71,2664 124,2664 197,2737 179.6,2754.4
  pour cut-out: 123,2353 129,2347 531,2347 531,2185 476,2130 453,2153 125,2153 125,2352 124,2353
  pour cut-out: 23,2157 24.29,2155.71 374.99,2155.71 374.99,1962.99 326,1914 314,1926 20,1926 20,2152 21,2153
  pour cut-out: 181,1806 183,1804 365,1804 365,1654 347,1636 345,1638 149,1638 149,1814 159,1824
  pour cut-out: 59,1210 167,1210 167,894 133,860 41,860 41,1202 54,1215
  pour cut-out: 11.22,1357.03 13.13,1355.12 418.76,1355.12 418.76,1333.92 571,1181.68 571,851 569,849 564.19,853.81 322.88,853.81 196,980.69 196,1179 144,1231 11,1231 11,1374.2 11.22,1374.42
  pour cut-out: 790.5,856.5 1179.37,1245.37 1179.37,1363.58 1160.42,1363.58 773.5,1750.5 371,1348 371,1276
  pour cut-out: 412.94,1332 500.44,1244.5 522.71,1244.5 522.71,1225.33 485,1187.62 370.3,1187.62 307.68,1250.24 333.45,1276 371,1276 371,1288.4 412.94,1330.34
  pour cut-out: 441,1538 441,1336 515,1262 546,1262 590,1306 519,1377 519,1418 483.76,1418 459.76,1442 472.43,1454.67 472.43,1530.26 451.74,1530.26 439,1543
  pour cut-out: 854,498 859,503 859,845 923,909 923,1058.56 804.44,1058.56 819,1044 819,498
  pour cut-out: 607,1037 607,834.26 636.82,804.43 807.83,804.43 807.83,966.17 737,1037
  pour cut-out: 83.34,770.34 83.68,770 608,770 608,433.06 618.06,423 620.34,425.28 698.58,425.28 698.58,313.58 671,286 487,286 452,321 451,320 69,320 69,768 68,769 74,775 88,775
  pour cut-out: 745,137 746,136 937,136 937,60 908,31 744,31 744,134 745,135
  pour cut-out: 1099,266 1099,186.14 1111.66,173.48 1084.18,146 753,146 740.55,158.45 740.55,252.55 1087.55,252.55 1100,265
  pour cut-out: 1485,499 1488,496 1723,496 1723,362 1683,322 1499,322 1482,339 1487,344 1487,499
  pour cut-out: 1532,1067 1537,1062 1691,1062 1691,941 1656,906 1526,906 1526,1062 1531,1067
  pour cut-out: 1290,1020 1290,274 1121,274 1121,1020
  pour cut-out: 915,739 917,737 1150,737 1150,305 1093,248 832,248 832,835.83
  pour cut-out: 1323,257 1324,256 1324,6 1842,6 1888,52 1888,325 1879,334 1367,334 1291,258
  pour cut-out: 167,219 168.72,220.72 438.55,220.72 514.95,144.32 484,113.37 484,65 429,10 167,10
  pour cut-out: 1515,1552 1515,1461 1514,1462 1355,1462 1355,1557 1364,1566 1510,1566 1510,1559 1518,1551
Bottom Layer:
  pour cut-out: 649,330 477,330 477,233 492,218 499,225 681,225 681,322 661,342
  pour cut-out: 961,437 960,438 810,438 810,301 848,263 960,263 960,436
  pour cut-out: 932,2536 951.64,2516.36 1482.36,2516.36 1517.02,2551.02 1454.05,2614 1010,2614
  pour cut-out: 923,1019 923,1001.32 884.94,963.26 928.96,919.24 1202.76,919.24 1203,919 1471.48,1187.48 1471.48,1219.03 1466.97,1219.03 1425,1261 1183,1019
  pour cut-out: 917.24,1476 917.24,1282.24 804,1169 703,1169 703,1311 874,1482 918,1482
  pour cut-out: 0,1964 35,1929 47,1929 47,113 139,21 139,6 135,2 130,7 45,7 45,11 0,56
  pour cut-out: 1198,401 1199,400 1469.75,400 1469.75,393.47 1153.14,76.86 1062,168 1062,267 1199,404
  pour cut-out: 1878.55,3173.5 1878.55,3301.45 1834,3346 77.58,3346 65.56,3333.98 105.97,3293.57 125.87,3293.57 156.19,3323.9 160.08,3320 1725.51,3320 1873.93,3171.58
  pour cut-out: 1757,1982 1880,1982 1880,1865 1876,1861 1757,1980
  pour cut-out: 1691,2146 1762,2146 1762,2005 1744,1987 1730,2001 1687,2001 1687,2149 1693,2155
  pour cut-out: 1151,1906 1206,1961 1277,1961 1277,1846 1302,1821 1296,1815 1156,1815 1143,1828 1143,1909 1150,1909
  pour cut-out: 479,3156 479,3347 41,3347 -3,3303 0,3300 0,1964 62.5,1901.5 103.5,1901.5 141,1939 141,3149 472,3149
  pour cut-out: 263,486 359,582 359,735 575,951 855,951 855,854.94 782.06,782 782.53,781.53 782.53,538.53 661,417 265,417 263,419
  pour cut-out: 468,448 469,449 659,449 659,326 640,307 468,307
  pour cut-out: 1298,1047 1493,1242 1641,1242 1641,1056 1653.03,1043.97 1778.76,1043.97 1778.77,400 1042.28,400 1042.28,956 1206,956 1299,1049
  pour cut-out: 1440,1825 433,1825 433,1589 1412,1589 1412.92,1588.08 1412.92,1800
  pour cut-out: 1755,2457 1877,2457 1888,2446 1880,2438 1880,1982 1757,1982 1749,1990 1749,2466
  pour cut-out: 1322,1959 1345,1982 1395,1982 1583,1794 1583,1506 1552,1506 1536,1522 1536,1715 1465,1715 1322,1858
  pour cut-out: 1590,402 1533,402 1513,382 1513,293 1585,293 1586,292 1590,296
  pour cut-out: 1767,147 1411,147 1359,199 1268,199 1268,58 1319,7 1719,7 1769,57 1769,148
  pour cut-out: 939,200 936,197 936,120 1195,120 1195,200
  pour cut-out: 211,246 89,124 116,97 116,9 944,9 944,246
  pour cut-out: 450,1226 259,1226 259,916 452,916 491,955 491,1220 455,1220 447,1228

## Silkscreen, mask and mechanical layers (free items; w line width, h text height)
Bottom Overlay:
  text "Ant-V1 latefly" at 74,2312 h60 r270

## Text inside footprints (layer, text, board x,y; h text height)
J1: Bottom Overlay "I/O" at 1484,143 h50 r270; Bottom Overlay "CLK" at 1583,134 h50 r270; Bottom Overlay "GND" at 1683,137 h50 r270
J2: Top Overlay "VCC" at 244.05,171.66 h50 r90; Top Overlay "GND" at 542.5,170.39 h50 r90; Top Overlay "Rx" at 332.95,169.12 h50 r90; Top Overlay "Tx" at 440.9,162.77 h50 r90
L1: Bottom Overlay "LCD_PIN14" at 991,2566 h30
U2: Top Overlay "3" at 621.94,2850.97 h50 r270; Top Overlay "1" at 621.94,3030.97 h50 r270
U3: Bottom Overlay "1" at 1501.06,1092.97 h50 r90; Bottom Overlay "3" at 1501.06,912.97 h50 r90
U7: Top Overlay "3" at 897.06,3099.03 h50 r90; Top Overlay "1" at 897.06,2919.03 h50 r90